# Altium PCB Receive.PcbDoc
Units mm, origin at the board's own origin, x right, y up, seen from the top; angles counter-clockwise.
Board outline 60 x 60 mm, 2 copper layers (Top Layer, Bottom Layer); 35 components, 32 nets, 120 pads, 40 vias.
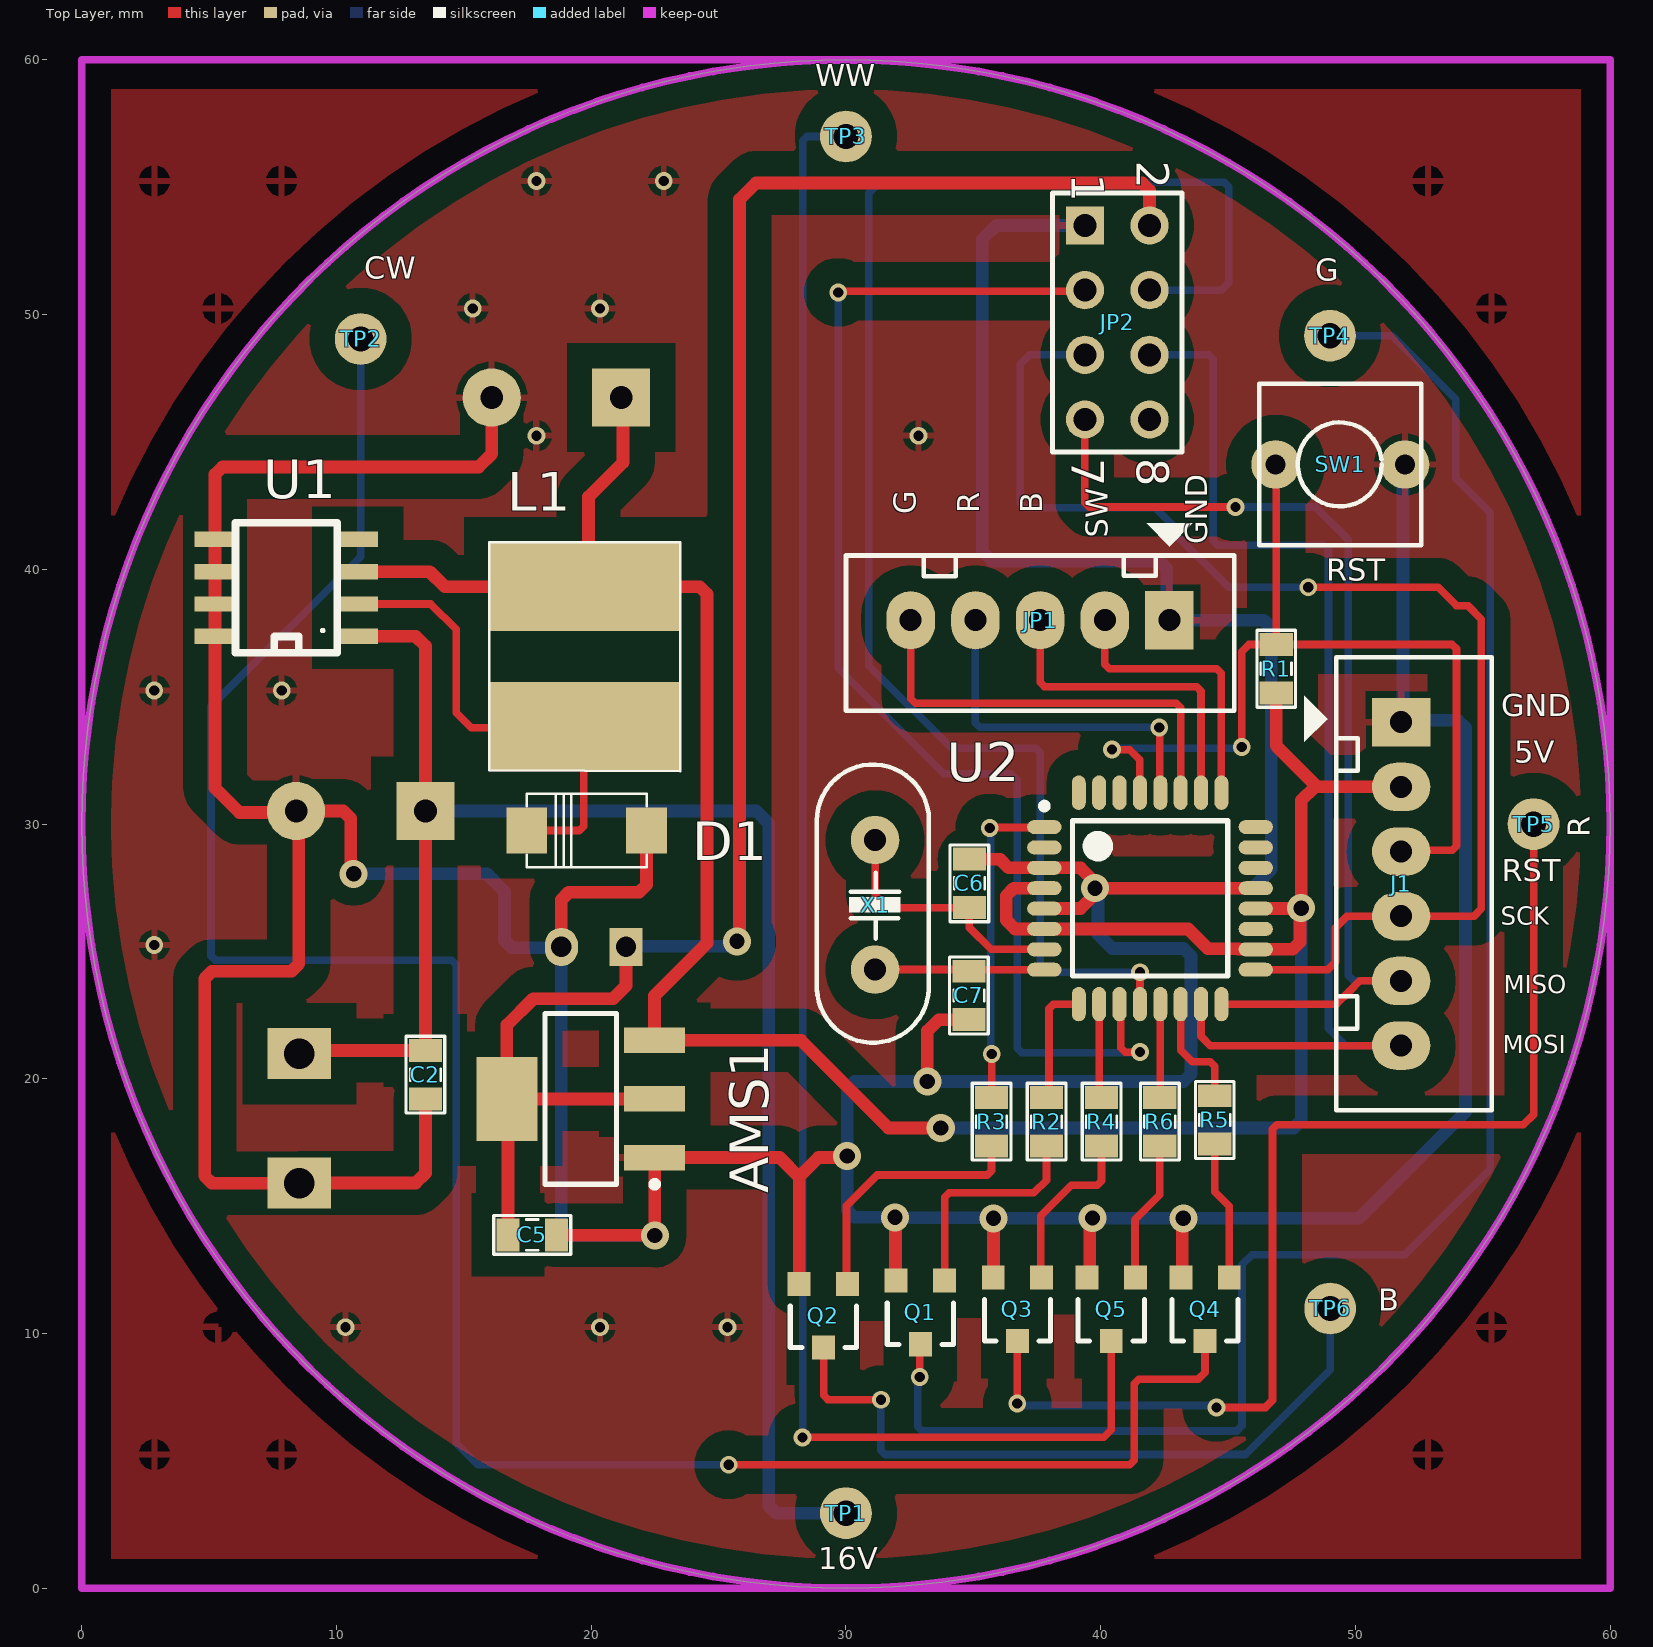
[diagram p0: Top Layer view]
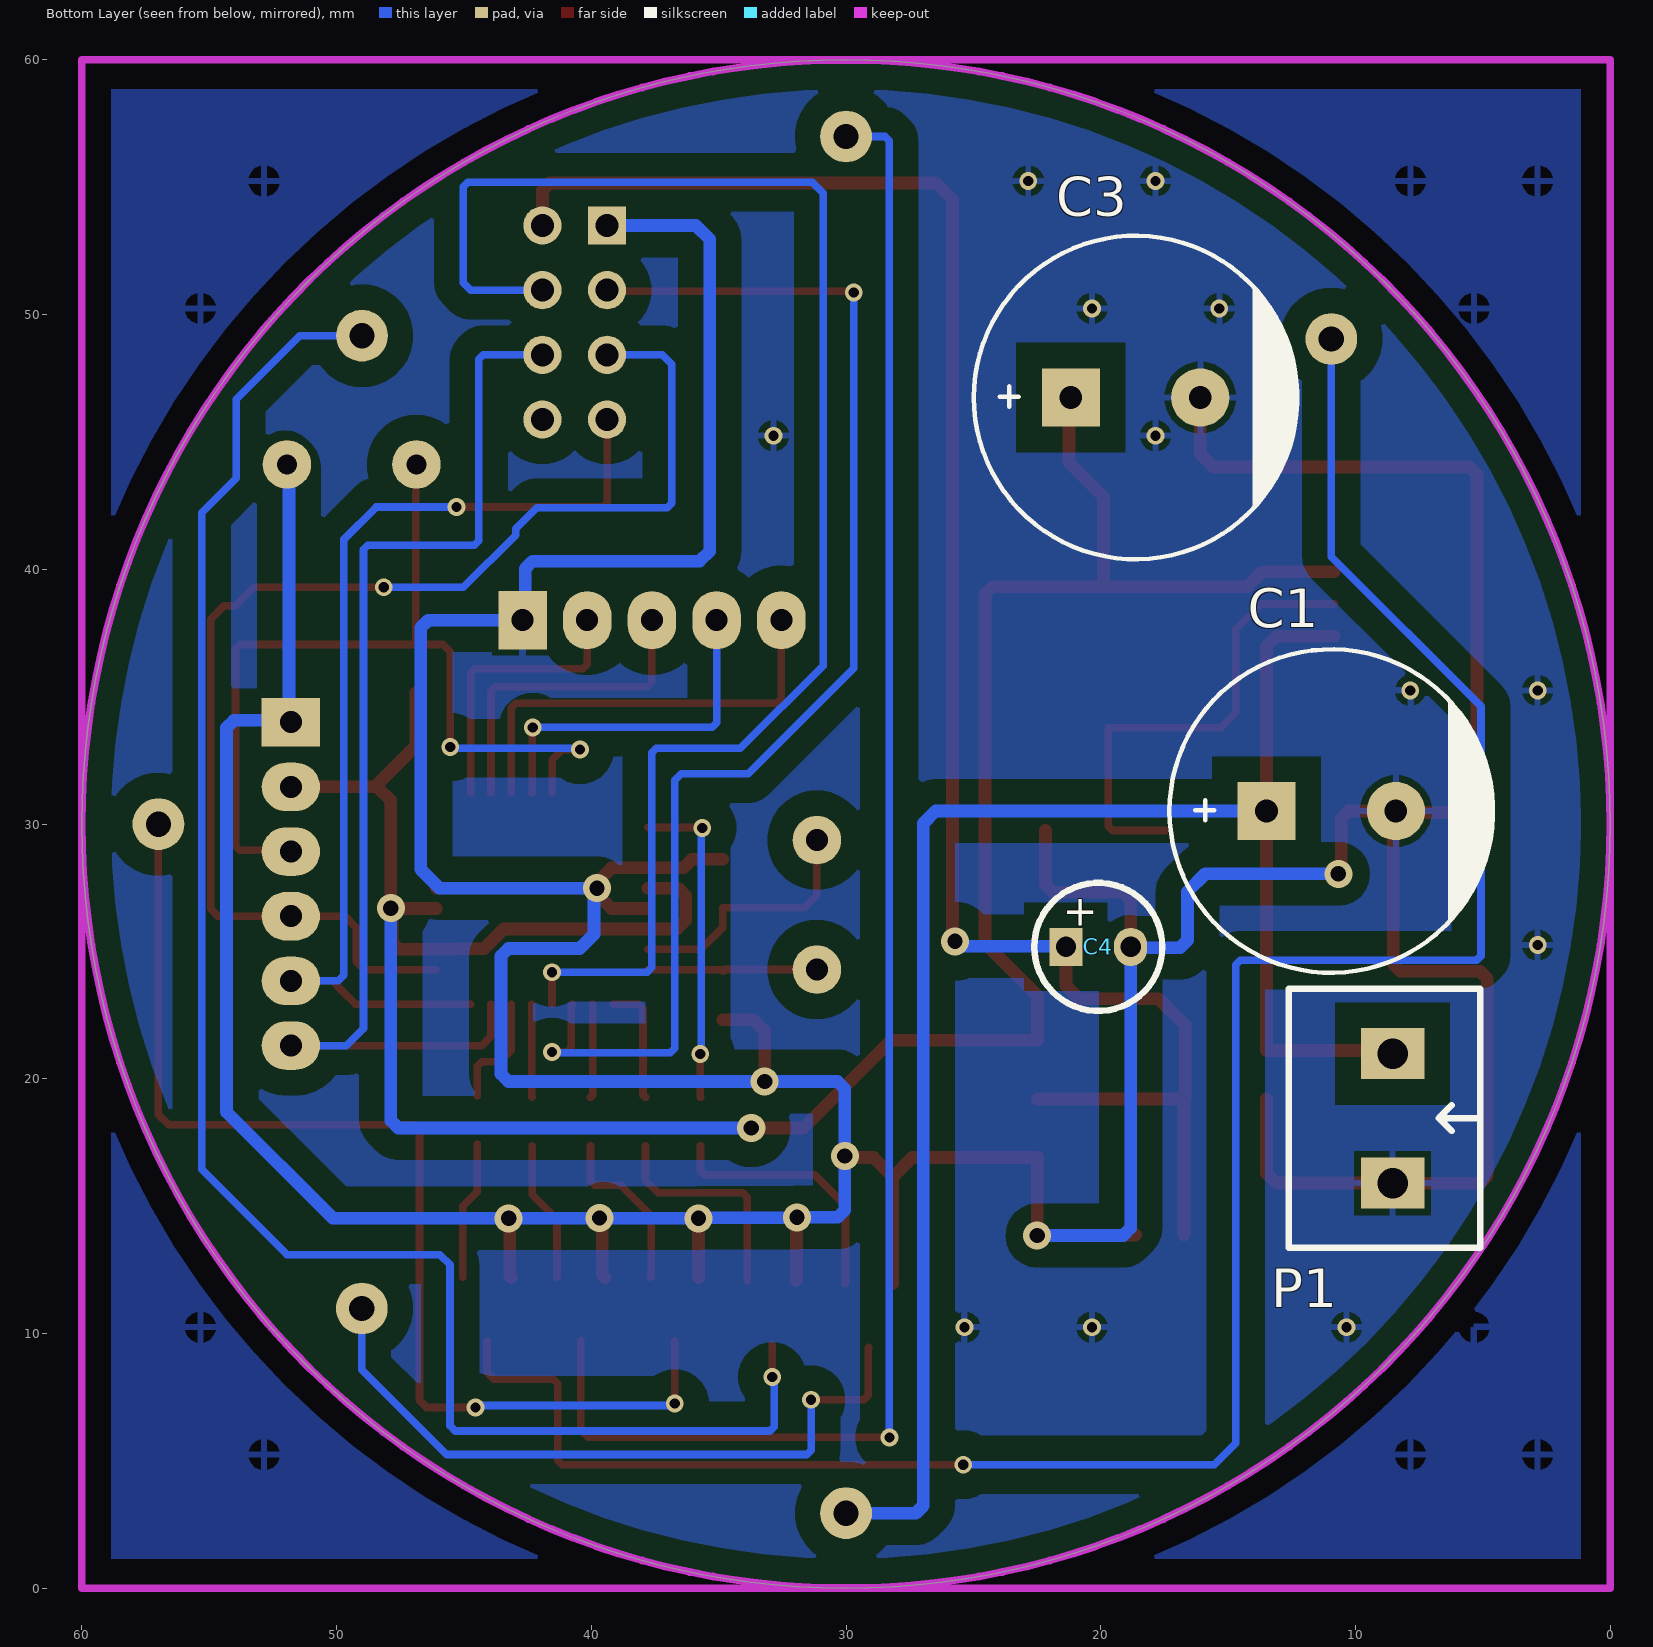
[diagram p1: Bottom Layer view, seen from below]
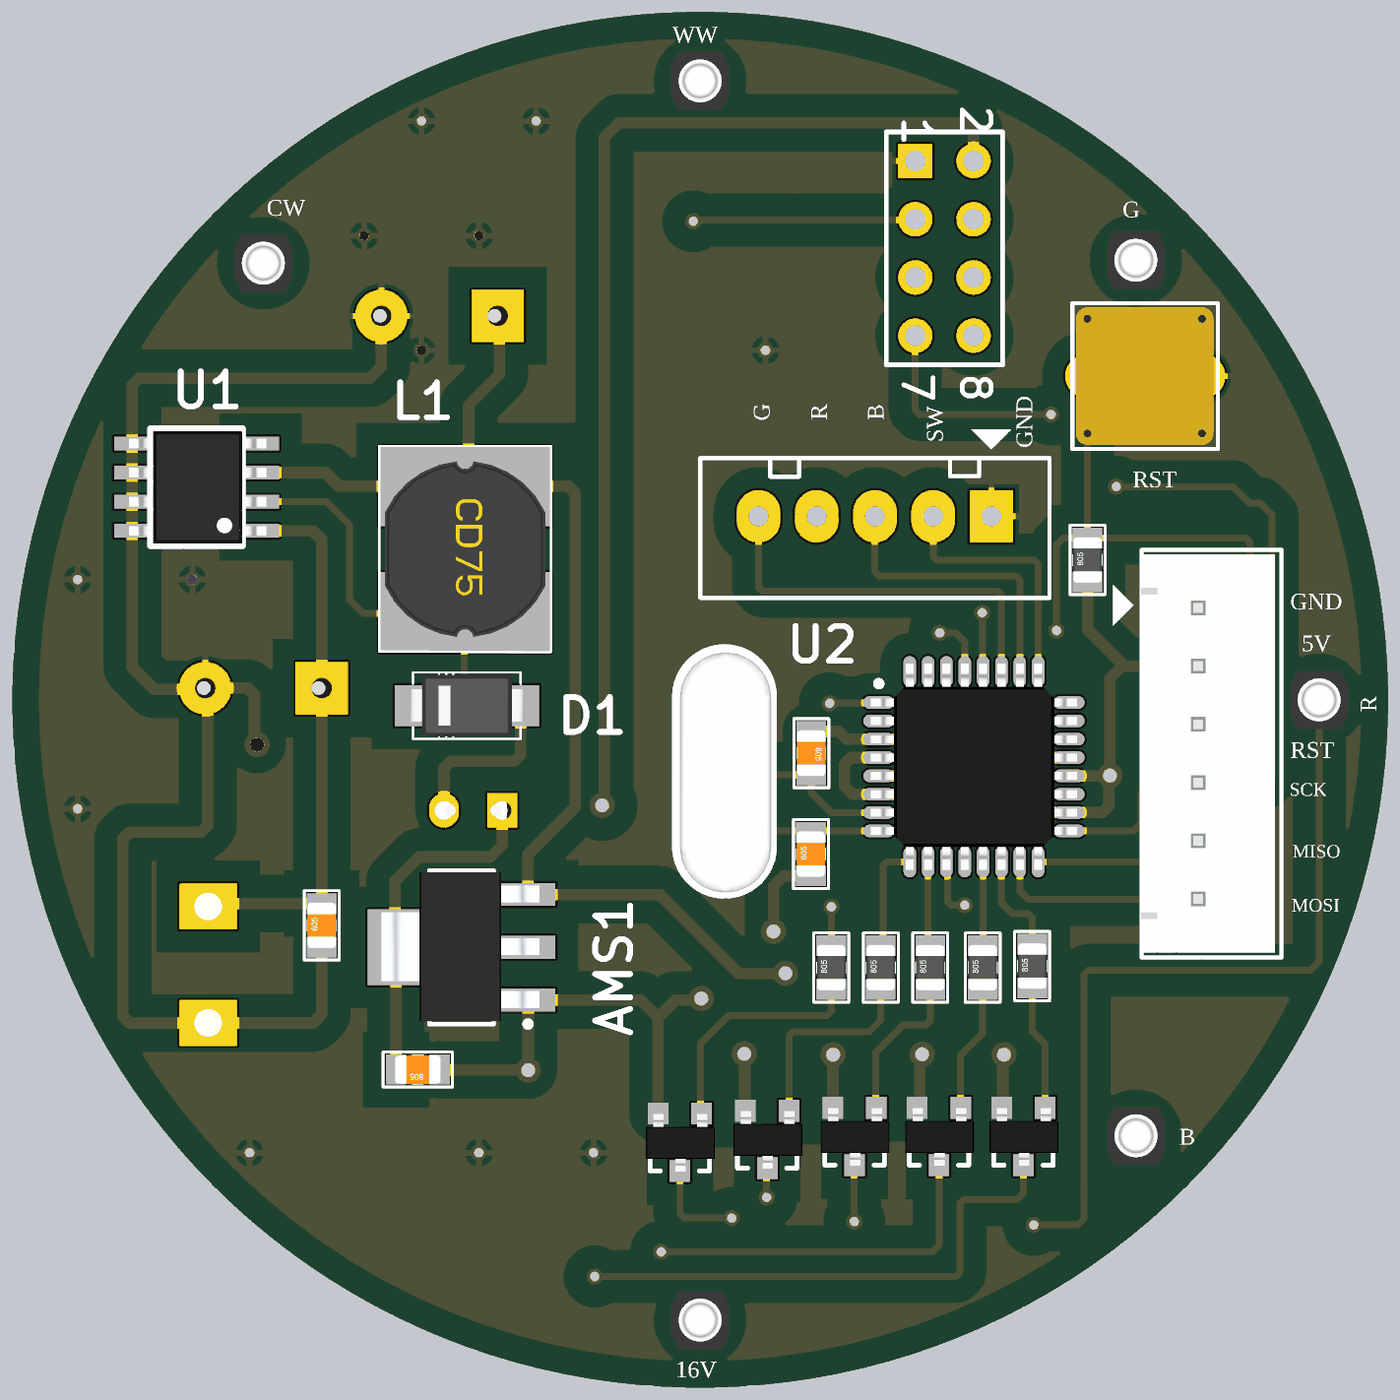
[diagram p2: 3D render of the assembled board from above, using the file's embedded part models]
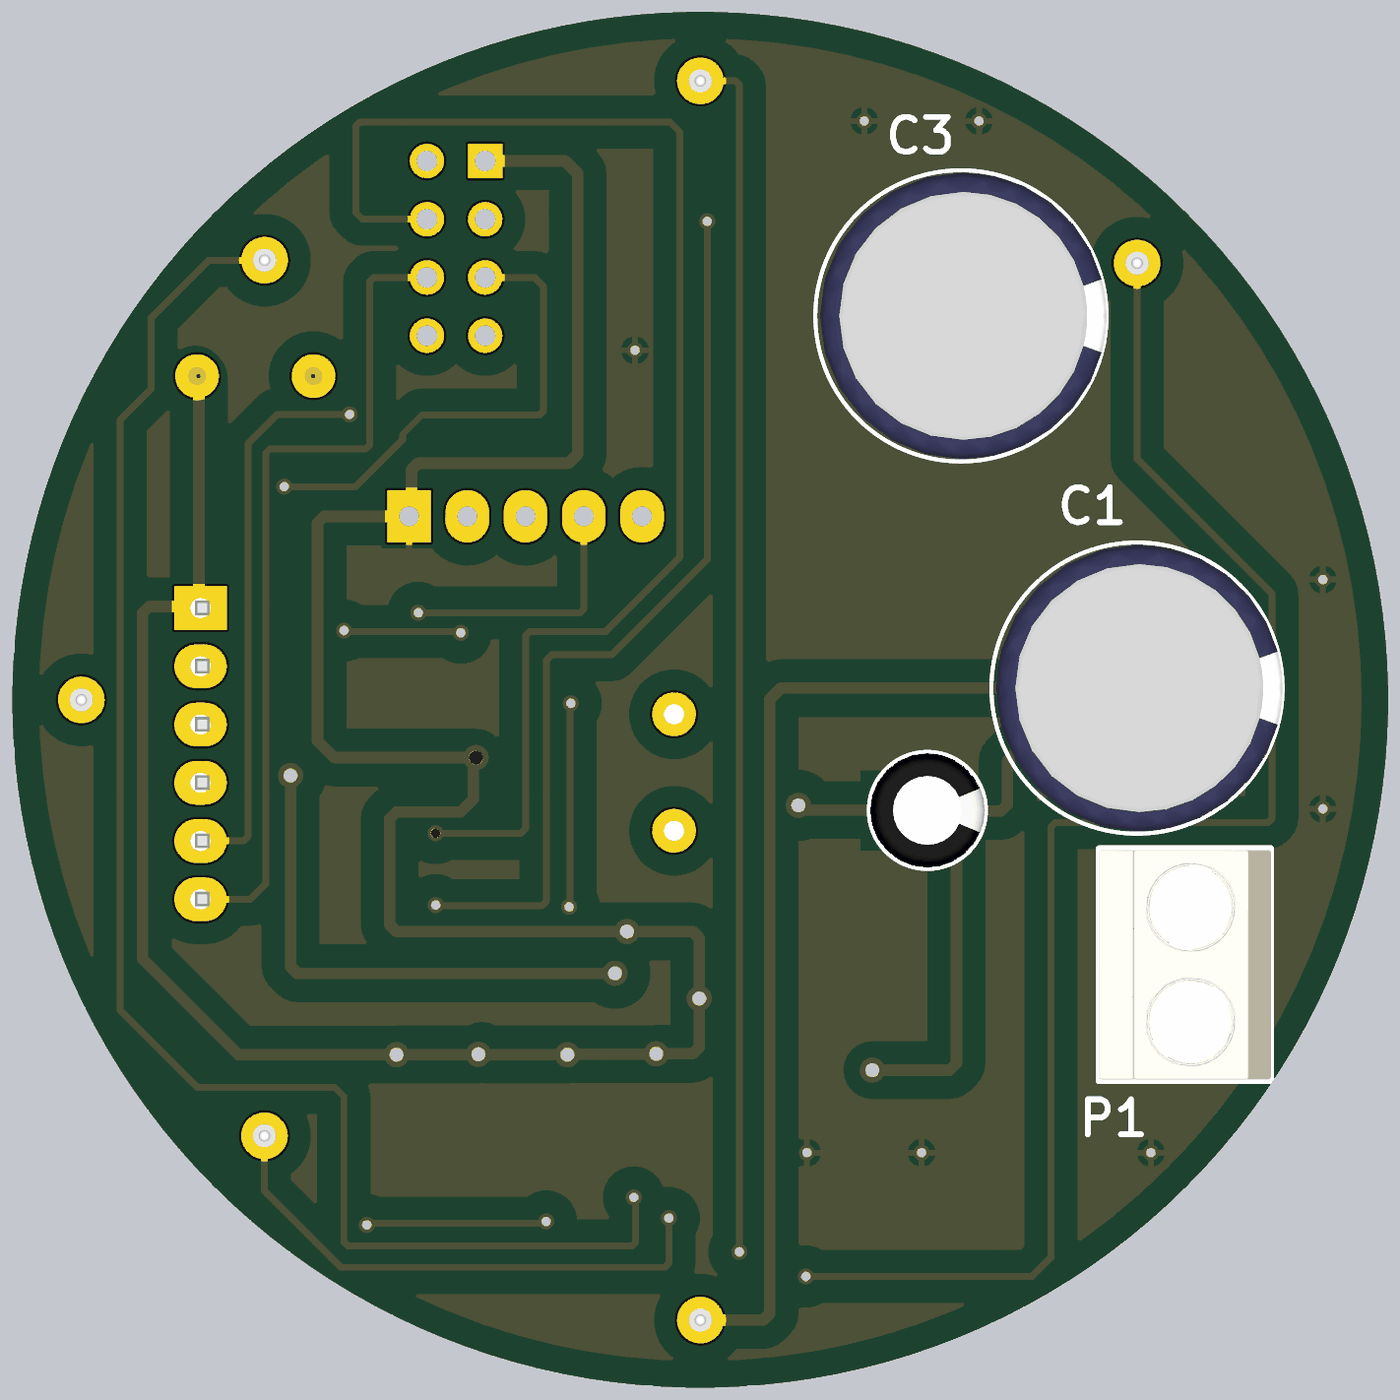
[diagram p3: 3D render of the assembled board from below, using the file's embedded part models]

## Layer stack, top to bottom
Top Solder: solder mask 0.0102, Solder Resist, Dk 3.5
Top Layer: signal copper 0.0356
Dielectric 1: dielectric 0.32, FR-4, Dk 4.8
Bottom Layer: signal copper 0.0356
Bottom Solder: solder mask 0.0102, Solder Resist, Dk 3.5

## Board outline
0,30 ccw(c30,30) 30,0 ccw(c30,30) 60,30 ccw(c30,30) 30,60 ccw(c30,30)

## Design rules (kind name [scope] priority, off if disabled: settings)
Clearance [All] p1: gap=1 ignorepadtopadclearanceinfootprint=FALSE
PolygonConnect [All] p1: connectstyle=Relief reliefconductorwidth=0.254 reliefentries=4 polygonreliefangle="90 Angle" airgapwidth=0.254
RoutingVias [InNetClass('NewClass')] p1: holewidth=0.6 width=1.1 viastyle="Through Hole" minholewidth=0.6 minwidth=1.1 maxholewidth=0.6 maxwidth=1.1
RoutingVias RoutingVias_1 [InNetClass('All Nets')] p2: holewidth=0.4 width=0.7 viastyle="Through Hole" minholewidth=0.4 minwidth=0.7 maxholewidth=0.4 maxwidth=0.7
SolderMaskExpansion [All] p1: expansion=0.102 istentingtop=FALSE
Width [InNetClass('NewClass')] p1: maxlimit=0.5 minlimit=0.5 preferedwidth=0.5
Width Width_1 [InNetClass('All Nets')] p2: maxlimit=0.3 minlimit=0.3 preferedwidth=0.3
30 further rules are at their usual default settings.

## Classes and differential pairs
net class NewClass: 3V3 5V +16 GND

## Components (designator, comment, footprint, x,y, rotation, side; value= is the part's Value field where it differs from the comment)
AMS1 "AMS1117 3V3" SOT223-4N 19.586,19.205 r180 top
C1 "" CP2/5 13.49,30.508 r180 bottom value=C?
C2 "105" CN-SMD-0805 13.49,20.16 r90 top
C3 "" CP2/5 21.17,46.744 r180 bottom value=C?
C4 "22uF" C5mm 20.094,25.174 r180 bottom
C5 "104" CN-SMD-0805 17.681,13.871 r180 top
C6 "22P" CN-SMD-0805 34.845,27.669 r270 top value=100pF
C7 "22P" CN-SMD-0805 34.826,23.269 r90 top value=100pF
D1 "1N5819" SS14 19.82,29.744 r180 top
J1 "ISP" Header6 51.795,33.999 r270 top
JP1 "JP5" XH2.54-5P 42.7,38.001 r180 top value="Connector 5"
JP2 "nRF24L01+" HDR2X4 39.38,53.499 r270 top
L1 "68U" CD75 19.745,36.569 r90 top
P1 "Header 2 - M" "Medium - Header 2" 8.537,18.443 r270 bottom
Q1 "2N222" SOT23-231 32.921,10.823 r180 top value=C9014
Q2 "2N222" SOT23-231 29.111,10.696 r180 top value=C9014
Q3 "2N222" SOT23-231 36.731,10.95 r180 top value=C9014
Q4 "2N222" SOT23-231 44.097,10.95 r180 top value=C9014
Q5 "2N222" SOT23-231 40.414,10.95 r180 top value=C9014
R1 "10K" RES-SMD-0805 46.891,36.096 r90 top value="R1/4W - 1K"
R2 "1K" RES-SMD-0805 37.874,18.316 r90 top value="R1/4W - 1K"
R3 "1K" RES-SMD-0805 35.715,18.316 r90 top value="R1/4W - 1K"
R4 "1K" RES-SMD-0805 40.033,18.316 r90 top value="R1/4W - 1K"
R5 "1K" RES-SMD-0805 44.478,18.382 r90 top value="R1/4W - 1K"
R6 "1K" RES-SMD-0805 42.319,18.316 r90 top value="R1/4W - 1K"
SW1 "SW" SW2 46.868,44.117 r0 top value="SW chip 2 pin"
TP1 "1" TP 29.995,2.943 r0 top
TP2 "1" TP 10.945,49.044 r0 top
TP3 "1" TP 29.995,56.994 r0 top
TP4 "1" TP 49.001,49.171 r0 top
TP5 "1" TP 56.995,29.994 r0 top
TP6 "1" TP 49.007,10.981 r0 top
U1 "XL 1509 - 5v" "XL1509 - SOIC 8" 8.029,39.271 r90 top
U2 "ATmega328-AU" TQFP32 41.938,27.079 r0 top
X1 "16Mhz" XT2 31.143,26.825 r90 top value=4Mhz

## Footprints (in the part's own frame and the unit in brackets; to place one, negate y for a bottom-side part, rotate by r counter-clockwise, add the part's x,y. Pads: shape width x height; smd on the part's side, far side on the other; paste and mask are expansions set on the pad)
C5mm [mm]
  rect 1.3x1.5 hole 0.8: 1(-1.27,0)
  oval 1.3x1.5 hole 0.8: 2(1.27,0)
  silkscreen extent -2.51,-2.51 2.51,2.51, body extent -2.5,-2.5 2.51,2.5, height 11.01
CD75 [mm] "L-68uH"
  rect 3.5x7.5 smd paste+0 mask+0.102: 1(-2.75,0) 2(2.75,0)
  silkscreen extent -4.5,-3.75 4.5,3.75, body extent -3.83,-3.5 3.83,3.5, height 5.04
CN-SMD-0805 [mm]
  rect 0.9x1.3 smd: 1(-0.95,0) 2(0.95,0)
  silkscreen extent -1.51,-0.76 1.51,0.76, body extent -1,-0.62 1,0.63, height 0.8
CP2/5 [mil] "Tu hoa 1000uF/25V,50V"
  rect 90x90 hole 35: 1(0,0)
  round 90 hole 35: 2(200,0)
  silkscreen extent -150,-250 350,250, body extent -142,-246 350,246, height 984
HDR2X4 [mm] "Connector; Header; 4x2 Position"
  rect 1.5x1.5 hole 0.9: 1(0,0)
  round 1.5 hole 0.9: 2(0,2.54) 3(2.54,0) 4(2.54,2.54) 5(5.08,0) 6(5.08,2.54) 7(7.62,0) 8(7.62,2.54)
  silkscreen extent -1.27,-1.27 8.89,3.81
Header6 [mil] "CON6"
  rect 75x90 hole 34: 1(0,0)
  oval 75x90 hole 34: 2(100,0) 3(200,0) 4(300,0) 5(400,0) 6(500,0)
  silkscreen extent -100,-150 600,140, body extent -92,-101 592,129, height 284
"Medium - Header 2" [mm]
  rect 2x2.5 hole 1.2: 1(-2.54,0) 2(2.54,0)
  silkscreen extent -5.08,-4.08 5.08,3.43, body extent -5,-4.07 5,3.43, height 10
RES-SMD-0805 [mm]
  rect 0.9x1.3 smd: 1(-0.95,0) 2(0.95,0)
  silkscreen extent -1.51,-0.76 1.51,0.76, body extent -1,-0.62 1,0.63, height 0.8
SOT23-231 [mm]
  rect 0.9x0.95 smd mask+0: 1(0.95,-1.25)
  rect 0.9x0.95 smd: 2(-0.95,-1.25) 3(0,1.25)
  silkscreen extent -1.3,-0.38 1.3,1.25, body extent -1.52,-1.23 1.48,1.27, height 1.06
SOT223-4N [mm] "SOT223, 4-Leads, Body 6.5x3.5mm, Pitch 2.3mm, Lead Span 7mm, IPC Medium Density"
  rect 2.4x1 smd: 1(-2.9,2.3) 2(-2.9,0) 3(-2.9,-2.3)
  rect 2.4x3.3 smd: 4(2.9,0)
  silkscreen extent -3.03,-3.35 1.4,3.47, body extent -3.39,-3.27 3.5,3.23, height 1.72
SS14 [mm] "Diode Schottly 1N5819"
  rect 1.6x1.8 smd paste+0 mask+0.102: 1(-2.35,0) 2(2.35,0)
  silkscreen extent -2.35,-1.45 2.35,1.45, body extent -2.5,-1.35 2.5,1.35, height 2.28
SW2 [mil] "SW button 2pin, 250x 250 mil"
  round 75 hole 31: 1(0,0) 2(200,0)
  silkscreen extent -25,-125 225,125, body extent -19,-118 217,118, height 177
TP [mil] "Connect 1"
  round 80 hole 39: TP1(0,0)
  body extent -50,-50 50,50, height 179
TQFP32 [mm] "Thin QFP, 32-Leads, Body 9x9mm, Pitch 0.8mm, IPC Low Density"
  oval 1.35x0.55 smd: 1(-4.15,2.8) 2(-4.15,2) 3(-4.15,1.2) 4(-4.15,0.4) 5(-4.15,-0.4) 6(-4.15,-1.2) 7(-4.15,-2) 8(-4.15,-2.8) 17(4.15,-2.8) 18(4.15,-2) 19(4.15,-1.2) 20(4.15,-0.4) 21(4.15,0.4) 22(4.15,1.2) 23(4.15,2) 24(4.15,2.8)
  oval 0.55x1.35 smd: 9(-2.8,-4.15) 10(-2,-4.15) 11(-1.2,-4.15) 12(-0.4,-4.15) 13(0.4,-4.15) 14(1.2,-4.15) 15(2,-4.15) 16(2.8,-4.15) 25(2.8,4.15) 26(2,4.15) 27(1.2,4.15) 28(0.4,4.15) 29(-0.4,4.15) 30(-1.2,4.15) 31(-2,4.15) 32(-2.8,4.15)
  silkscreen extent -4.27,-3.05 3.05,3.75, body extent -4.5,-4.5 4.5,4.5, height 1.4
XH2.54-5P [mil] "CON5"
  rect 75x90 hole 34: 1(0,0)
  oval 75x90 hole 34: 2(100,0) 3(200,0) 4(300,0) 5(400,0)
  silkscreen extent -100,-150 500,140
"XL1509 - SOIC 8" [mm] "IC ha ap 5V"
  rect 0.6x1.6 smd paste+0 mask+0.102: 1(-1.905,-2.8) 2(-0.635,-2.8) 3(0.635,-2.8) 4(1.905,-2.8) 5(1.905,2.8) 6(0.635,2.8) 7(-0.635,2.8) 8(-1.905,2.8)
  silkscreen extent -2.55,-2 2.55,2, body extent -2.45,-3.05 2.45,2.95, height 1.75
XT2 [mil] "Footpin for Crystal 2 pin"
  round 75 hole 34: 1(-100,0) 2(100,0)
  silkscreen extent -213,-83 217,90, body extent -216,-87 216,90, height 144

## Part data
AMS1: library part AMS1117, "AMS"
C1 C3: library part "Cap Pol3", "Polarized Capacitor (Surface Mount)", LatestRevisionDate=17-Jul-2002, LatestRevisionNote="Re-released for DXP Platform.", PackageReference=C0805, Publisher="Altium Limited"
C2 C5: library part "CAP 33P_0805"
C4: library part "Cap Pol 5mm", "Polarized Capacitor (Axial)", LatestRevisionDate=17-Jul-2002, LatestRevisionNote="Re-released for DXP Platform.", PackageReference=POLAR0.8, Published=8-Jun-2000, Publisher="Altium Limited"
C6 C7: library part CN1, "Cap np  1pF - 472pF"
J1: library part "JUMP 6", "JUMP DON DUC 2.54"
JP1: library part "Header 5P", "Connector 5"
JP2: library part "JUMP DOI-4", "JUMP DOI DUC", LatestRevisionDate=17-Jul-2002, LatestRevisionNote="Re-released for DXP Platform.", Publisher="Altium Limited"
L1: library part L100uH3A, "Cuon cam"
P1: "Header, 2-Pin, Medium", LatestRevisionDate=17-Jul-2002, LatestRevisionNote="Re-released for DXP Platform.", Publisher="Altium Limited"
Q1 Q2 Q3 Q4 Q5: library part NPN_EBC, "P 600mW, EBC"
R1 R2 R3 R4 R5 R6: library part "RES 1/4W", "Tro 1/4W"
SW1: library part SW2, "Switch button 2 pin"
TP1 TP2 TP3 TP4 TP5 TP6: library part TP, "CONNECT 1"
U1: "IC HA AP 5V"
U2: "8-bit AVR Microcontroller, 32KB Flash, 1KB EEPROM, 2KB SRAM, 32-pin TQFP, Industrial Grade (-40°C to 85°C)", Supplier Part Number 1=ATMEGA328-AU-ND, Code_JEDEC=MS-026-ABA, ComponentLink1Description="Manufacturer Link", ComponentLink1URL=http://www.atmel.com/products/avr/default.asp?, ComponentLink2Description="ATmega48A/48PA/88A/88PA/168A/168PA/328/328P Datasheet", ComponentLink2URL=http://www.atmel.com/dyn/resources/prod_documents/8271.pdf, ComponentLink3Description="ATmega48A/48PA/88A/88PA/168A/168PA/328/328P Summary", ComponentLink3URL=http://www.atmel.com/dyn/resources/prod_documents/8271S.pdf, ComponentLink4Description="Atmel.com Home", ComponentLink4URL=http://www.atmel.com, DatasheetVersion="revA, Jan-2010", PackageDescription="32-Lead, 7x7x1.0 mm Body, 0.8mm Lead Pitch, Thin Profile Plastic Quad Flat Package (TQFP)", PackageReference=32A, PackageVersion="revB, Oct-2001", Published=1-Apr-2010, Publisher="Altium Limited", Supplier 1=Digi-Key, Supplier 2=Mouser, Supplier Part Number 2=556-ATMEGA328-AU
X1: library part XT2, "Crystal For all Crystal 2pin."

## Via types
v1: diameter 0.7, hole 0.4, Top Layer to Bottom Layer, tented both sides, 28 vias
v2: diameter 1.1, hole 0.6, Top Layer to Bottom Layer, tented both sides, 12 vias

## Nets (pads, with @x,y where several pads share a name; then routed paths per layer and width w, separated by ;. In a path a pad name is that pad's centre, name@x,y a point inside that pad or via, vN(x,y) a via of type N, cw(c..) or ccw(c..) an arc to the next point about the centre after c; other vN are vias at no path point)
3V3: AMS1.2 AMS1.4 C4.1 C5.2 JP2.2 | length 72.4
  Top Layer w0.5: C5.2 16.731,19.16 AMS1.4 ; C4.1 21.364,23.65 20.856,23.142 17.723,23.142 16.686,22.105 AMS1.4 ; AMS1.2 AMS1.4 ; v2(25.72,25.394) 25.82,25.494 25.82,54.519 26.47,55.169 41.627,55.169 41.92,54.876 JP2.2
  Bottom Layer w0.5: C4.1 21.385,25.195 25.359,25.195 25.558,25.394 v2(25.72,25.394)
5V: AMS1.3 C3.1 J1.2 L1.2 R1.1 U1.3 U2.4 U2.6 U2.18 U2.20 | length 106
  Top Layer w0.3: U1.3 U1.3@10.842,39.919
  Top Layer w0.5: U1.3 13.658,39.906 14.245,39.319 L1.2 ; C3.1 21.245,46.669 21.245,44.194 19.895,42.844 19.895,39.469 L1.2 ; v2(33.72,18.069) 31.67,18.069 28.234,21.505 AMS1.3 22.486,23.26 24.545,25.319 24.545,39.026 24.252,39.319 L1.2 ; U2.4 36.588,27.479 36.295,27.186 36.295,26.219 36.635,25.879 U2.6 43.435,25.879 44.21,25.104 45.405,25.104 ; 45.405,25.079 U2.18 47.53,25.079 47.82,25.369 v2@47.82,26.386 ; U2.20 47.855,26.679 v2(47.87,26.694) 47.87,30.919 48.41,31.459 ; R1.1 46.891,33.068 48.455,31.504 48.41,31.459 ; J1.2 48.41,31.459
  Bottom Layer w0.5: v2(33.72,18.069) 47.577,18.069 47.87,18.362 v2(47.87,26.694)
+16: C1.1 C2.2 P1.1 TP1.TP1 U1.1 | length 67.3
  Top Layer w0.5: P1.1 8.664,21.11 C2.2 C1.1 13.49,36.985 13.109,37.366 U1.1
  Bottom Layer w0.5: C1.1 26.481,30.508 26.97,30.019 26.97,3.236 27.263,2.943 TP1.TP1
BUTTON: JP1.2 U2.25 | length 11.1
  Top Layer w0.3: JP1.2 40.16,36.27 40.336,36.094 44.562,36.094 44.738,35.918 U2.25
CE: JP2.3 U2.11 | length 51.3
  Top Layer w0.3: v1(29.695,50.869) 29.74,50.914 39.335,50.914 JP2.3 ; U2.11 40.786,22.881 40.786,21.22 40.962,21.044 v1(41.538,21.044)
  Bottom Layer w0.3: v1(29.695,50.869) 29.695,36.119 33.845,31.969 36.47,31.969 36.72,31.719 36.72,21.195 36.896,21.019 41.513,21.019 v1(41.538,21.044)
CN_B: JP1.3 U2.26 | length 12.9
  Top Layer w0.3: JP1.3 37.62,35.57 37.796,35.394 43.762,35.394 43.938,35.218 U2.26
CN_G: JP1.5 U2.27 | length 17.2
  Top Layer w0.3: JP1.5 32.54,34.92 32.716,34.744 42.962,34.744 43.138,34.568 U2.27
CN_R: JP1.4 U2.28 | length 13.9
  Top Layer w0.3: v1(42.295,33.794) 42.317,33.773 42.317,31.251 U2.28
  Bottom Layer w0.3: JP1.4 35.08,33.97 35.256,33.794 v1(42.295,33.794)
CS: JP2.4 U2.12 | length 61.7
  Top Layer w0.3: U2.12 41.542,22.933 41.542,24.176 v1(41.545,24.179)
  Bottom Layer w0.3: v1(41.545,24.179) 37.81,24.179 37.62,24.369 37.62,32.793 37.444,32.969 34.145,32.969 30.895,36.219 30.895,54.769 31.32,55.194 44.844,55.194 45.02,55.018 45.02,51.244 44.735,50.959 JP2.4
GND: AMS1.1 C1.2 C2.1 C3.2 C4.2 C5.1 C6.1 C7.1 D1.1 J1.1 JP1.1 JP2.1 P1.2 Q1.1 Q2.1 Q3.1 Q4.1 Q5.1 SW1.2 U1.5 U1.6 U1.7 U1.8 U2.3 U2.5 U2.21 | length 273.5
  Top Layer w0.5: v2(10.67,28.044) 10.555,28.159 10.555,30.215 10.262,30.508 C1.2 ; C2.1 13.49,16.289 13.104,15.903 P1.2 8.528,15.894 5.113,15.894 4.82,16.187 4.82,23.926 5.113,24.219 8.227,24.219 8.52,24.512 8.52,30.398 C1.2 ; C3.2@16.045,46.789 C3.2 16.09,44.532 15.577,44.019 5.522,44.019 5.229,43.726 U1.5 U1.6 U1.7 U1.8 5.229,31.41 6.188,30.451 8.353,30.451 C1.2 ; C5.1 18.645,13.858 22.482,13.858 v2(22.495,13.844) 22.495,16.896 AMS1.1 27.402,16.905 28.161,16.146 ; C4.2 18.824,27.026 19.117,27.319 21.877,27.319 22.17,27.612 D1.1 ; Q2.1 28.161,16.146 ; v2(30.045,16.969) 29.981,16.905 28.92,16.905 28.161,16.146 ; v2(31.92,14.557) 31.946,14.531 31.946,12.099 Q1.1 ; v2(33.195,19.894) 33.195,21.869 33.645,22.319 C7.1 ; C6.1 36.045,28.619 36.385,28.279 U2.3 39.208,28.279 39.664,27.824 39.664,27.594 v2(39.779,27.479) ; Q3.1 35.788,12.207 35.788,14.512 v2(35.795,14.519) ; U2.5 39.208,26.679 39.664,27.134 39.664,27.364 v2(39.779,27.479) ; Q5.1 39.569,12.305 39.569,14.429 v2(39.675,14.535) ; Q4.1 43.196,12.249 43.196,14.47 v2(43.245,14.519) ; U2.21 v2(39.779,27.479)
  Bottom Layer w0.5: v2(10.67,28.044) 15.895,28.044 16.595,27.344 16.595,25.437 16.888,25.144 18.794,25.144 C4.2 18.824,14.137 19.117,13.844 v2(22.495,13.844) ; v2(31.92,14.557) 30.338,14.557 30.045,14.849 30.045,19.601 30.338,19.894 43.252,19.894 43.545,20.187 43.545,24.818 43.252,25.111 40.453,25.111 39.893,25.671 39.893,27.364 v2(39.779,27.479) 45.955,27.479 46.695,28.219 46.695,37.708 46.402,38.001 JP1.1 42.595,38.106 42.595,40.026 42.302,40.319 35.745,40.319 35.345,40.719 35.345,52.944 35.9,53.499 JP2.1 ; v2@31.939,14.538 35.776,14.538 v2(35.795,14.519) ; v2@35.837,14.527 39.398,14.527 39.52,14.649 39.52,14.69 39.683,14.527 43.237,14.527 v2(43.245,14.519) 50.145,14.519 54.32,18.694 54.32,33.776 54.027,34.069 J1.1@51.865,34.069 ; J1.1 J1.1@51.865,34.069 ; SW1.2@52.025,44.194 51.87,44.039 51.87,34.074 J1.1@51.865,34.069
  other v1: 10.345,10.244 20.345,10.244 25.345,10.244 2.845,25.244 2.845,35.244 7.845,35.244 17.845,45.244 32.845,45.244 15.345,50.244 20.345,50.244 17.845,55.244 22.845,55.244
LED_B: R3.2 U2.1 | length 12.8
  Top Layer w0.3: v1(35.645,29.844) 35.662,29.862 37.771,29.862 U2.1 ; R3.2 35.72,19.271 v1(35.72,20.969)
  Bottom Layer w0.3: v1(35.645,29.844) 35.682,29.807 35.682,21.007 v1(35.72,20.969)
LED_G: R2.2 U2.9 | length 4.8
  Top Layer w0.3: R2.2 37.97,19.362 37.97,22.753 38.146,22.929 U2.9
LED_R: R4.2 U2.10 | length 3.7
  Top Layer w0.3: U2.10 39.938,19.361 R4.2
LED_W: R5.2 U2.14 | length 4.6
  Top Layer w0.3: U2.14 43.138,21.126 43.595,20.669 44.302,20.669 44.478,20.493 R5.2
LED_Y: R6.2 U2.13 | length 3.7
  Top Layer w0.3: R6.2 42.338,19.285 U2.13
MISO: J1.5 JP2.7 U2.16 | length 40.9
  Top Layer w0.3: JP2.7 39.38,42.62 39.556,42.444 v1(45.295,42.444) ; U2.16 49.255,22.929 49.77,23.444 50.165,23.839 J1.5
  Bottom Layer w0.3: v1(45.295,42.444) 48.445,42.444 49.72,41.169 49.72,24.06 49.941,23.839 J1.5
MOSI: J1.6 JP2.6 U2.15 | length 45.6
  Top Layer w0.3: U2.15 43.938,21.662 44.301,21.299 J1.6 J1.6@51.791,21.303
  Bottom Layer w0.3: JP2.6 44.244,48.419 44.42,48.243 44.42,41.12 44.596,40.944 48.769,40.944 48.945,40.768 48.945,21.969 49.615,21.299 J1.6
NetD1_2: D1.2 L1.1 U1.2 | length 19
  Top Layer w0.3: U1.2 13.703,38.636 14.695,37.644 14.695,34.369 15.289,33.775 19.701,33.775 19.701,29.92 19.525,29.744 D1.2
NetQ1_2: Q1.2 R2.1 | length 8.9
  Top Layer w0.3: Q1.2 33.871,15.343 34.047,15.519 37.374,15.519 37.874,16.019 R2.1
NetQ2_2: Q2.2 R3.1 | length 10.3
  Top Layer w0.3: Q2.2 30.02,11.987 30.02,15.019 31.22,16.219 35.539,16.219 35.715,16.395 R3.1
NetQ3_2: Q3.2 R4.1 | length 6.8
  Top Layer w0.3: Q3.2 37.645,12.236 37.645,14.617 38.847,15.819 39.857,15.819 40.033,15.995 R4.1
NetQ4_2: Q4.2 R5.1 | length 5.5
  Top Layer w0.3: R5.1 44.478,15.561 45.047,14.992 Q4.2
NetQ5_2: Q5.2 R6.1 | length 5.6
  Top Layer w0.3: Q5.2 41.345,12.219 41.345,14.469 42.319,15.443 R6.1
RESET: J1.3 R1.2 SW1.1 U2.29 | length 36.6
  Top Layer w0.3: v1@40.295,32.919 v1(40.445,32.919) 41.145,32.919 41.538,32.526 U2.29 ; v1(45.538,33.019) 45.538,36.763 45.821,37.046 R1.2 ; SW1.1 46.891,44.093 R1.2 ; J1.3@52.445,28.964 53.794,28.964 53.97,29.14 53.97,36.87 53.794,37.046 53.593,37.046 R1.2
  Bottom Layer w0.3: v1(40.445,32.919) 40.495,32.969 45.488,32.969 v1(45.538,33.019)
SCK: J1.4 JP2.5 U2.17 | length 50.3
  Top Layer w0.3: U2.17 48.905,24.279 49.22,24.594 49.22,25.929 49.67,26.379 J1.4 54.655,26.379 54.945,26.669 54.945,38.044 54.42,38.569 53.97,38.569 53.245,39.294 v1(48.145,39.294)
  Bottom Layer w0.3: JP2.5 37.221,48.419 36.845,48.043 36.845,42.595 37.021,42.419 42.145,42.419 42.97,41.594 42.97,41.344 45.02,39.294 v1(48.145,39.294)
TRAN_B: Q2.3 TP6.TP1 | length 27.7
  Top Layer w0.3: Q2.3 29.12,9.437 29.12,7.57 29.296,7.394 v1(31.37,7.394)
  Bottom Layer w0.3: v1(31.37,7.394) 31.37,5.42 31.546,5.244 45.67,5.244 49.007,8.581 TP6.TP1
TRAN_G: Q1.3 TP4.TP1 | length 70.5
  Top Layer w0.3: v1(32.895,8.294) 32.895,9.547 Q1.3
  Bottom Layer w0.3: v1(32.895,8.294) 32.82,8.219 32.82,6.345 32.996,6.169 45.345,6.169 45.545,6.369 45.545,12.694 45.945,13.094 51.945,13.094 55.295,16.444 55.295,42.219 53.945,43.569 53.945,46.669 51.443,49.171 TP4.TP1
TRAN_R: Q3.3 TP5.TP1 | length 45.2
  Top Layer w0.3: v1(36.72,7.244) 36.72,9.689 Q3.3 ; v1(44.545,7.094) 46.469,7.094 46.745,7.37 46.745,18.018 46.921,18.194 56.595,18.194 56.995,18.594 TP5.TP1
  Bottom Layer w0.3: v1(36.72,7.244) 36.795,7.169 44.47,7.169 v1(44.545,7.094)
TRAN_W: Q4.3 TP2.TP1 | length 89.4
  Top Layer w0.3: v1(25.395,4.844) 41.144,4.844 41.32,5.02 41.32,8.018 41.496,8.194 43.82,8.194 44.097,8.471 Q4.3
  Bottom Layer w0.3: TP2.TP1 10.945,40.494 5.07,34.619 5.07,24.82 5.246,24.644 14.519,24.644 14.695,24.468 14.695,5.694 15.545,4.844 v1(25.395,4.844)
TRAN_Y: Q5.3 TP3.TP1 | length 68.4
  Top Layer w0.3: v1(28.295,5.919) 40.12,5.919 40.414,6.213 Q5.3
  Bottom Layer w0.3: v1(28.295,5.919) 28.295,56.818 28.471,56.994 TP3.TP1
X1: C6.2 U2.7 X1.2 | length 10.1
  Top Layer w0.3: X1.2 31.143,27.196 31.62,26.719 C6.2 34.845,25.936 35.702,25.079 U2.7
X2: C7.2 U2.8 X1.1 | length 6.7
  Top Layer w0.3: X1.1 34.76,24.285 C7.2 34.886,24.279 U2.8
pads on no net: JP2.8 U1.4 U2.2 U2.19 U2.22 U2.23 U2.24 U2.30 U2.31 U2.32

## Polygon pours and split planes (outlines as drawn)
GND on Bottom Layer "GND_L02_P000" (solid, pour order 0): 0,60 0,0 60,0 60,60
GND on Top Layer "GND_L01_P001" (solid, pour order 1): 0,60 0,0 60,0 60,60

## Keep-outs
Keep-Out Layer:
  circle w0.3: c30,30 r30
  lines w0.3: 0,0 0,30 0,60 30,60 60,60 60,30 60,0 30,0 0,0

## Silkscreen, mask and mechanical layers (free items; w line width, h text height)
Top Overlay:
  text "WW" at 28.785,58.665 h1.5
  text "CW" at 11.088,51.115 h1.5
  text "G" at 48.416,51.04 h1.5
  text "R" at 35.52,42.2 h1.5 r90
  text "B" at 38,42.198 h1.5 r90
  text "G" at 33.024,42.165 h1.5 r90
  text "SW" at 40.579,41.234 h1.5 r90
  text "GND" at 44.479,40.985 h1.5 r90
  text "RST" at 48.86,39.265 h1.5
  text "GND" at 55.73,33.94 h1.5
  text "5V" at 56.235,32.115 h1.5
  text "R" at 59.495,29.475 h1.5 r90
  text "RST" at 55.735,27.465 h1.5
  text "SCK" at 55.697,25.811 h1.2
  text "MISO" at 55.822,23.111 h1.2
  text "MOSI" at 55.79,20.761 h1.2
  text "B" at 50.893,10.594 h1.5
  text "16V" at 28.919,0.44 h1.5

## Text inside footprints (layer, text, board x,y; h text height)
C4: Bottom Overlay "+" at 21.491,26.012 h1.2
JP2: Top Overlay "8" at 41.412,44.355 h1.27 r270; Top Overlay "7" at 38.872,44.355 h1.27 r270; Top Overlay "1" at 38.872,55.531 h1.27 r270; Top Overlay "2" at 41.412,56.039 h1.27 r270